# Altium PCB HW_Z-BAND_SMART_AMP_R1.PcbDoc (part 4 of 5)
Units mil, origin at the board's own origin, x right, y up, seen from the top; angles counter-clockwise.
Board outline 10200 x 3900 mil, 4 copper layers (Top Layer, Int1 (GND), Int2 (PWR), Bottom Layer), stack 60.134 mil thick; 398 components, 240 nets, 1098 pads, 2492 vias.
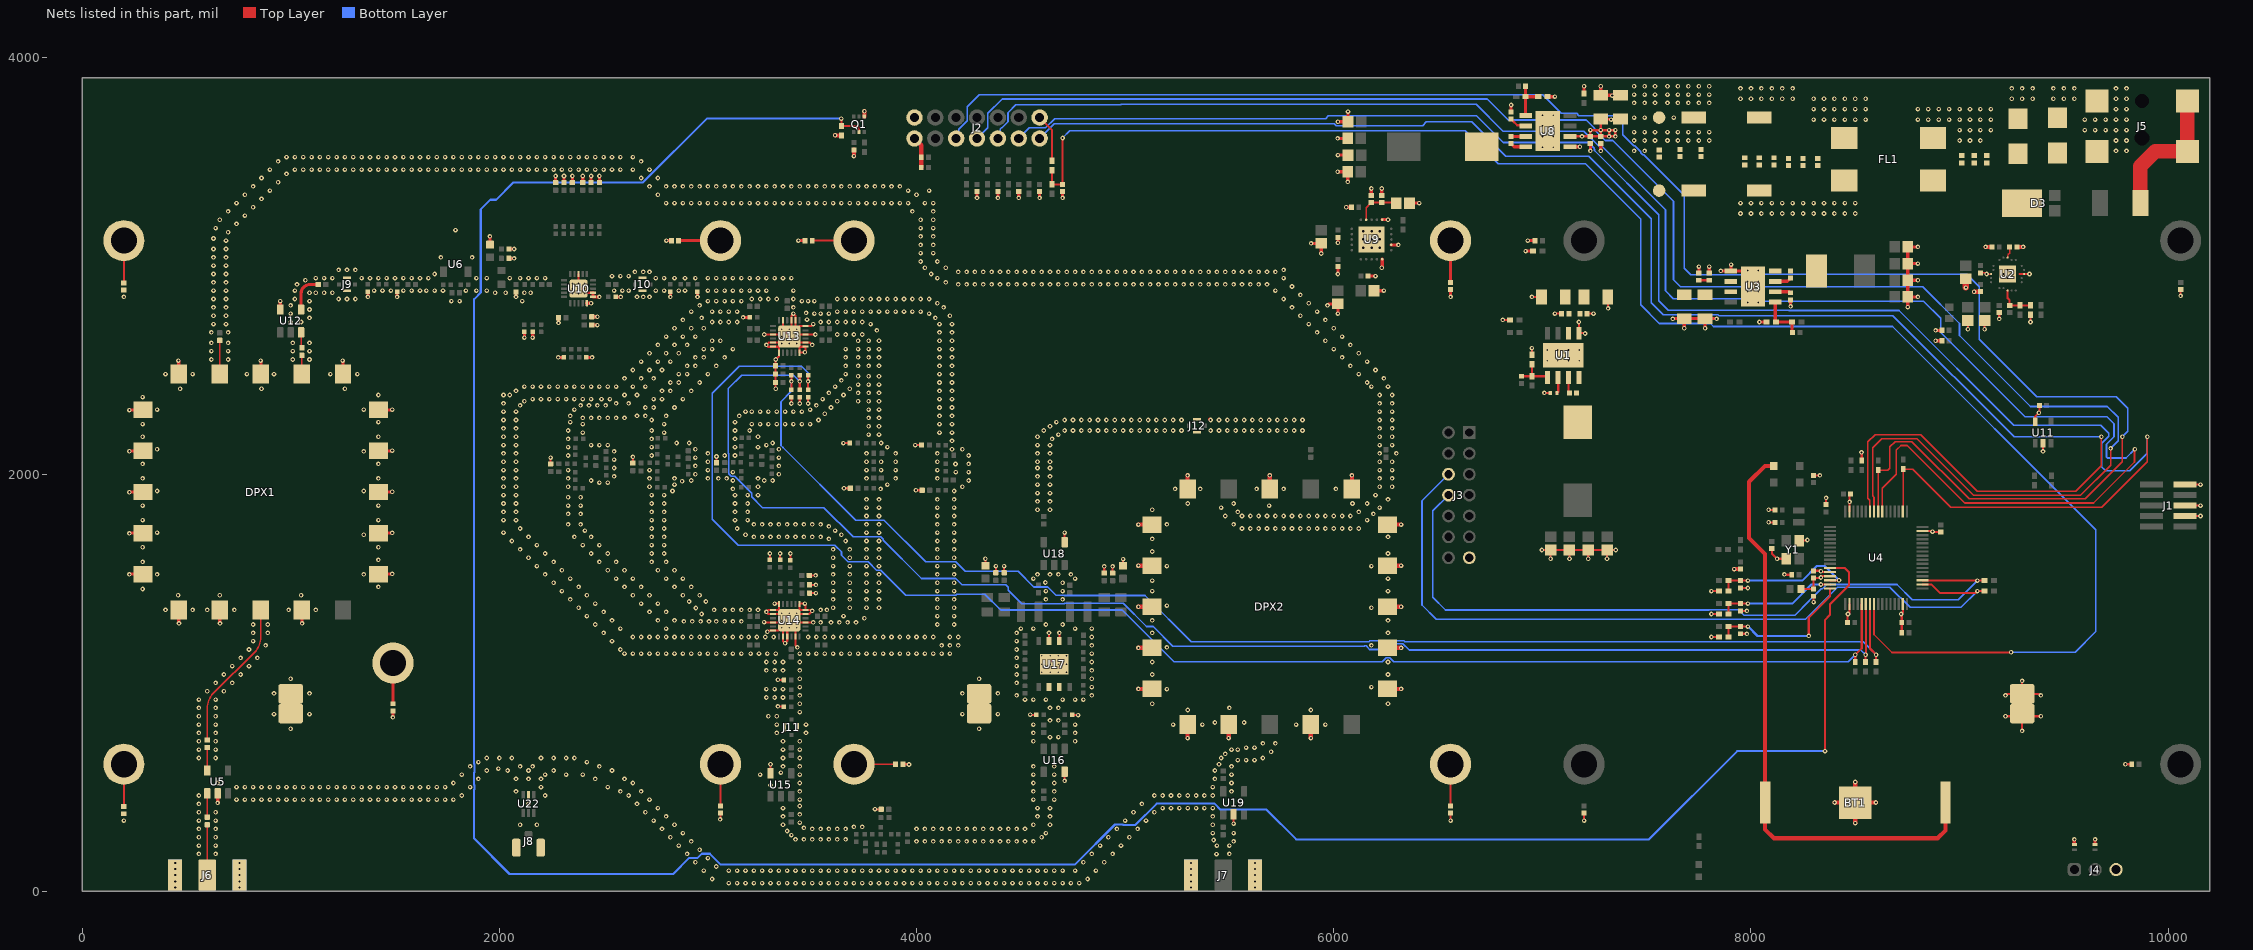
[diagram p5: the nets of this part, all layers, seen from the top]

## Via types
v1: diameter 22, hole 10, Top Layer to Bottom Layer, tented both sides, 2396 vias
v2: diameter 19.68, hole 7.87, Top Layer to Bottom Layer, tented both sides, 30 vias
v3: diameter 19.68, hole 7.87, Top Layer to Bottom Layer, 28 vias
v4: diameter 19.68, hole 9.84, Top Layer to Bottom Layer, tented both sides, 20 vias
v5: diameter 15.75, hole 7.87, Top Layer to Bottom Layer, tented both sides, 9 vias
v6: diameter 23.62, hole 11.81, Top Layer to Bottom Layer, 9 vias

## Nets (pads, with @x,y where several pads share a name; then routed paths per layer and width w, separated by ;. In a path a pad name is that pad's centre, name@x,y a point inside that pad or via, vN(x,y) a via of type N, cw(c..) or ccw(c..) an arc to the next point about the centre after c; other vN are vias at no path point) (continued)
GND: BT1.1 C1.2 C3.1 C4.1 C5.1 C6.1 C8.1 C9.1 C10.1 C11.1 C12.1 C13.1 C14.1 C15.1 C16.1 C17.2 C18.1 C19.1 C20.1 C21.1 C22.1 C24.1 C33.1 C34.1 C35.1 C36.1 C37.1 C38.1 C39.1 C40.1 C41.1 C42.1 C43.2 C45.1 C46.1 C47.1 C48.1 C50.1 C51.1 C52.1 C53.1 C54.1 C55.1 C56.1 C57.2 C58.2 C59.2 C60.1 C61.1 C62.2 C63.1 C64.1 C65.1 C66.1 C67.1 C69.1 C70.1 C71.2 C72.1 C73.1 C74.2 C76.1 C77.1 C78.1 C79.1 C81.1 C82.1 C83.1 C84.1 C85.1 C86.1 C87.1 C88.1 C89.1 C90.2 C91.1 C92.1 C93.1 C94.1 C95.1 C96.2 C97.1 C98.1 C99.1 C100.1 C101.1 C102.1 C103.1 C104.1 C105.1 C111.1 C115.1 C118.1 C119.1 C120.1 C121.1 C122.1 C123.1 C124.1 C125.1 C126.1 C127.1 C128.1 C129.1 C136.1 C137.2 C138.2 C153.2 C154.1 C155.2 C157.1 C159.1 C160.1 C161.1 C162.1 C163.1 C168.1 C170.1 C177.1 C179.1 C190.1 D1.1 D10.1 DPX1.1 DPX1.2 DPX1.3 DPX1.4 DPX1.5 DPX1.6 DPX1.8 DPX1.10 DPX1.11 DPX1.12 DPX1.13 DPX1.14 DPX1.15 DPX1.16 DPX1.17 DPX1.19 DPX2.1 DPX2.2 DPX2.3 DPX2.4 DPX2.5 DPX2.6 DPX2.8 DPX2.10 DPX2.11 DPX2.12 DPX2.13 DPX2.14 DPX2.15 DPX2.16 DPX2.17 DPX2.19 FB5.2 J1.3 J1.5 J1.9 J2.7 J2.8 J3.13 J4.3 J6.2 J7.2 J8.G1 J8.G2 J9.G1 J9.G2 J10.G1 J10.G2 J11.G1 J11.G2 J12.G1 J12.G2 L12.1 L15.1 Q1.1 R1.1 R3.1 R4.1 R17.1 R18.1 R19.1 R28.1 R31.2 R36.1 R39.1 R42.1 R44.1 R50.1 R51.1 R52.1 R54.1 R56.2 R61.1 R63.1 R64.1 R65.1 R66.1 R69.1 R70.1 R71.1 R72.1 R82.1 R83.1 R84.1 R85.1 R90.2 R91.1 T1.1 TP1.1 TP2.1 TP3.1 U1.1 U1.9 U2.8 U2.18 U2.21 U3.1 U3.9 U4.12 U4.18 U4.31 U4.47 U4.63 U5.2 U6.2 U8.1 U8.9 U9.5 U9.7 U9.11 U9.21 U10.10 U10.11 U10.12 U10.18 U10.21 U11.2 U11.5 U12.4 U13.3 U13.5 U13.6 U13.7 U13.12 U13.13 U13.14 U13.16 U13.18 U13.20 U13.21 U13.23 U13.25 U14.3 U14.5 U14.6 U14.7 U14.12 U14.13 U14.14 U14.16 U14.18 U14.20 U14.21 U14.23 U14.25 U15.4 U16.4 U17.2 U17.3 U17.6 U17.7 U17.9 U18.6 U19.2 U22.2 Y1.2 Y1.4 | length 13021.4
  Top Layer w6: C66.1@9100,2965.35 9124.65,2965.35 v1(9130,2960) U2.18@9151.26,2960
  Top Layer w10: C170.1@2246.06,2049.61 v1(2246.06,2079.8) ; v5(2379.94,2890) 2399.63,2870.31 U10.12@2449.89,2870.31 ; v5(2379.94,2915) U10.18@2379.94,2959.94 ; C177.1@2640.08,2053.46 v1(2640.08,2083.66) ; C157.1@3041.34,2055.12 v1(3041.34,2085.31) ; v1(3058.78,345.94) 3060,347.17 C37.1@3060,375.35 ; v1(3269.68,1291.33) 3269.68,1290.64 3270.16,1290.16 U14.16@3312.24,1290.16 3380.16,1290.16 v2(3390,1300) 3399.84,1290.16 U14.3@3467.76,1290.16 3504.84,1290.16 v1(3505,1290) ; v1(3270,2670) 3311.77,2670 U13.3@3312.24,2670.47 3344.72,2670.47 v2(3354.57,2660.63) ; v1(3285,1245) 3290.79,1250.79 U14.18@3312.24,1250.79 3340.35,1250.79 v2(3354.57,1265) 3360.47,1259.09 U14.20@3360.47,1222.24 3360.47,1199.53 v1(3370,1190) 3380.16,1200.16 U14.21@3380.16,1222.24 3380.16,1255.16 v2(3390,1265) ; R69.1@3297.24,1590.12 v1(3297.24,1620.31) ; U15.4@3299.84,566.18 3299.84,609.84 v1(3300,610) ; v1(3320,1380) 3338.54,1380 U14.12@3340.79,1377.76 U14.25@3340.79,1347.78 ; v1(3325,2410) 3323.78,2411.22 C126.1@3323.78,2440 C125.1@3323.78,2480.63 C124.1@3323.78,2520.63 3323.78,2548.78 v1(3325,2550) 3340.79,2565.79 U13.7@3340.79,2582.87 U13.25@3340.79,2612.85 ; v1(3335,887.05) 3336.22,885.83 R85.1@3364.41,885.83 ; v1(3335,1015) 3336.22,1013.78 R84.1@3364.41,1013.78 ; R70.1@3346.46,1590.12 v1(3346.46,1620.31) ; v2(3354.57,2695.63) 3360.47,2701.54 U13.23@3360.47,2738.39 ; v2(3390,2695.63) 3399.84,2705.47 U13.21@3399.84,2738.39 3399.84,2759.84 v1(3410,2770) 3419.53,2760.47 U13.20@3419.53,2738.39 3419.53,2701.54 v2(3425.43,2695.63) 3439.65,2709.84 U13.18@3467.76,2709.84 3494.84,2709.84 v1(3505,2720) ; v1(3395,1620) 3395.67,1619.33 R71.1@3395.67,1588.15 ; v1(3400,2339.37) R64.1@3400,2369.57 ; v2(3425.43,1265) 3419.53,1259.09 U14.23@3419.53,1222.24 3419.53,1179.6 3422.44,1176.68 3422.44,1172.56 3425,1170 v1(3428.44,1170) ; v2(3425.43,2660.63) 3435.28,2670.47 U13.16@3467.76,2670.47 3514.53,2670.47 v1(3515,2670) ; v1(3440,2339.37) R65.1@3440,2369.57 ; v1(3480,2339.37) R66.1@3480,2369.57 ; C127.1@3486.22,1515 v1(3516.42,1515) ; C129.1@3487.48,1430.16 v1(3517.68,1430.16) ; C128.1@3487.48,1470.16 v1(3517.68,1470.16) ; v1(3500,2620) 3488.9,2631.1 U13.14@3467.76,2631.1 3429.91,2631.1 v2(3425.43,2626.63) U13.25@3439.21,2612.85 ; v1(3649.33,2149.61) L12.1@3679.53,2149.61 ; v1(3652.48,1933.07) C179.1@3682.68,1933.07 ; v1(3800.91,394.92) 3802.13,393.7 C159.1@3830.32,393.7 ; C39.1@3934.65,610 3962.83,610 v1(3964.06,608.78) ; v1(3993.74,2139.92) L15.1@4023.94,2139.92 ; v1(3996.89,1923.39) C190.1@4027.09,1923.39 ; C155.2@4330,1561.02 v1(4330,1595) ; C154.1@4380,1528.11 v1(4380,1560) ; C153.2@4420,1528.11 v1(4420,1560) ; v1(4545.16,847.68) 4546.38,846.46 R90.2@4574.57,846.46 ; U17.7@4635,1200.24 v1(4635,1240) ; U17.6@4685,1200.24 v1(4685,1240) ; v1(4710,530) U16.4@4710,573.58 ; U18.6@4710,1674.92 v1(4710,1720) ; R91.1@4745.43,846.46 4773.62,846.46 v1(4774.84,845.24) ; C136.1@4900,1526.22 v1(4900,1558.11) ; C137.2@4940,1526.22 v1(4940,1558.11) ; C138.2@4990,1559.13 C138.2@4990,1561.02 v1(4990,1593.11) ; v1(5520,325) U19.2@5520,370 ; v1(6560,340) C41.1@6560,375.35 ; v1(6810,2740) R3.1@6844.72,2740 ; R4.1@6950,2572.64 v1(6950,2605) ; v1(6950,2850) C4.1@6995.83,2850 ; v1(6997.99,1637.01) C8.1@7040,1637.01 ; v1(7010,2390) C1.2@7038.5,2390 ; v1(7040,1595) C8.1@7040,1637.01 ; v1(7060,2770) C6.1@7092.68,2770 ; v1(7130,1595) C9.1@7130,1637.01 ; v1(7175,2730) U1.1@7175,2676.3 7203.7,2676.3 v1(7205,2675) ; v1(7200,340) C160.1@7200,375.35 ; C5.1@7214.65,2770 v1(7245,2770) ; v1(7220,1595) C10.1@7220,1637.01 ; v1(7310,1595) C11.1@7310,1637.01 ; C3.1@7314.17,2850 7314.17,2795.83 v1(7315,2795) ; v1(7335,3815) 7337.09,3817.09 C77.1@7375,3817.09 ; v1(7352.01,1637.01) C11.1@7310,1637.01 ; v1(7810,1220) R44.1@7847.36,1220 ; v1(7810,1330) R42.1@7847.36,1330 ; v1(7810,1440) R19.1@7847.36,1440 ; C100.1@7950,1235.35 7979.65,1235.35 v1(7980,1235) ; C16.1@7950,1345.35 7979.65,1345.35 v1(7980,1345) ; C15.1@7950,1455.35 7984.65,1455.35 v1(7985,1455) ; v1(8085,1770) 8086.46,1768.54 C58.2@8115.35,1768.54 ; v1(8085,1830) 8086.46,1828.54 C57.2@8115.35,1828.54 ; C59.2@8100,1643.9 8100,1620 v1(8125,1595) 8125.24,1595.24 Y1.4@8168.5,1595.24 ; v1(8160,1520) 8161.46,1518.54 C62.2@8195.35,1518.54 ; Y1.2@8231.5,1681.85 8266.85,1681.85 v1(8270,1685) ; v1(8300,1387) C54.1@8300,1415.35 ; C55.1@8300,1537.32 8332.68,1537.32 v1(8335,1535) 8338.9,1531.1 U4.12@8378.5,1531.1 ; C63.1@8300,1994.65 8329.65,1994.65 v1(8330,1995) ; C64.1@8360,1854.65 v1(8360,1887) ; C18.1@8462.68,1290 8462.68,1327.68 v1(8465,1330) 8472.05,1337.05 U4.18@8472.05,1378.5 ; U4.63@8472.05,1821.5 8472.05,1867.05 v1(8473,1868) 8473,1900.68 C17.2@8477.32,1905 ; v1(8530,2105) 8531.08,2103.92 R31.2@8531.08,2065.48 ; C19.1@8722.68,1240 C102.1@8722.68,1290 8722.68,1327.32 v1(8720,1330) 8727.95,1337.95 U4.31@8727.95,1378.5 ; U4.47@8821.5,1727.95 8867.05,1727.95 v1(8870,1725) 8872.32,1722.68 C20.1@8910,1722.68 ; v1(9040,2695) C70.1@9040,2737.01 ; v1(9120,2695) C69.1@9120,2737.01 ; v1(9190,2745) C71.2@9190,2775.35 ; v1(9220,840) 9269.2,840 ccw(c9269.2,883.55) TP3.1@9300,852.76 ; v1(9220,940) cw(c9237.49,922.51) 9237.49,947.24 TP3.1@9300,947.24 ; 9287.46,2960 U2.8@9309.13,2960 v1(9335,2960) ; v1(9300,770) TP3.1@9300,852.76 ; v1(9300,1010) TP3.1@9300,947.24 ; v1(9340,2730) R36.1@9340,2764.72 ; U11.5@9362.6,2251.18 9362.6,2277.6 v1(9380,2295) 9382.68,2297.68 C14.1@9382.68,2330 ; v1(9390,840) 9330.8,840 cw(c9330.8,883.55) TP3.1@9300,852.76 ; v1(9390,940) ccw(c9372.51,922.51) 9372.51,947.24 TP3.1@9300,947.24 ; v1(9400,2110) U11.2@9400,2148.82 ; v1(9795,610) C161.1@9825.35,610 ; v1(10060,2855) C162.1@10060,2885.35 ; J1.3@10080.12,1800 v1(10155,1800) ; J1.5@10080.12,1850 v1(10155,1850) ; J1.9@10080.12,1950 v1(10155,1950) ; U14.25@3340.79,1347.78 v2(3354.57,1334) 3350.09,1329.53 U14.14@3312.24,1329.53 3290.47,1329.53 v1(3280,1340) 3289.21,1349.21 U14.13@3312.24,1349.21 3339.35,1349.21 U14.25@3340.79,1347.78 ; U13.25@3340.79,2612.85 v2(3354.57,2626.63) 3350.09,2631.1 U13.5@3312.24,2631.1 3291.1,2631.1 v1(3280,2620) 3288.58,2611.42 U13.6@3312.24,2611.42 3339.35,2611.42 U13.25@3340.79,2612.85 ; U14.25@3439.21,1347.78 U14.7@3439.21,1377.76 3441.46,1380 v1(3465,1380) 3467.76,1377.24 U14.6@3467.76,1349.21 ; U14.25@3439.21,1347.78 3440.65,1349.21 U14.6@3467.76,1349.21 ; U14.25@3439.21,1347.78 v2(3425.43,1334) 3429.91,1329.53 U14.5@3467.76,1329.53 3484.53,1329.53 v1(3500,1345) 3495.79,1349.21 U14.6@3467.76,1349.21 ; U13.25@3439.21,2612.85 3440.65,2611.42 U13.13@3467.76,2611.42 3467.76,2587.76 v1(3465,2585) 3460,2585 3457.87,2582.87 U13.12@3439.21,2582.87 U13.25@3439.21,2612.85 ; C8.1@7040,1637.01 C9.1@7130,1637.01 ; C9.1@7130,1637.01 C10.1@7220,1637.01 ; C10.1@7220,1637.01 C11.1@7310,1637.01
  Top Layer w15: v1(226.89,1519.96) 228.19,1521.26 DPX1.15@291.89,1521.26 ; v1(226.89,1716.81) 228.19,1718.11 DPX1.14@291.89,1718.11 ; v1(226.89,1913.66) 228.19,1914.96 DPX1.13@291.89,1914.96 ; v1(226.89,2110.51) 228.19,2111.81 DPX1.12@291.89,2111.81 ; v1(226.89,2307.36) 228.19,2308.66 DPX1.11@291.89,2308.66 ; v1(461.85,2544.92) 463.15,2543.62 DPX1.10@463.15,2479.92 ; DPX1.16@463.15,1350 463.15,1286.3 v1(464.45,1285) ; v1(650,425) U5.2@650,470 ; DPX1.17@660,1350 660,1286.3 v1(661.3,1285) ; v1(855.55,2544.92) 856.85,2543.62 DPX1.8@856.85,2479.92 ; U12.4@950,2789.84 v1(950,2830) ; DPX1.19@1053.7,1350 1053.7,1286.3 v1(1055,1285) ; v1(1249.25,2544.92) 1250.55,2543.62 DPX1.6@1250.55,2479.92 ; v1(1370,2850) R50.1@1370,2874.57 ; DPX1.1@1421.81,1521.26 1485.51,1521.26 v1(1486.81,1522.56) ; DPX1.2@1421.81,1718.11 1485.51,1718.11 v1(1486.81,1719.41) ; DPX1.3@1421.81,1914.96 1485.51,1914.96 v1(1486.81,1916.26) ; DPX1.4@1421.81,2111.81 1485.51,2111.81 v1(1486.81,2113.11) ; DPX1.5@1421.81,2308.66 1485.51,2308.66 v1(1486.81,2309.96) ; v1(1490,835) C36.1@1490,865.35 ; v1(1510,2850) R51.1@1510,2874.57 ; C60.1@1955,3101.02 v1(1955,3140) ; C111.1@2046.22,3035 v1(2070.79,3035) ; C61.1@2046.22,3080 v1(2070.79,3080) ; v1(2080,2850) C168.1@2080,2873.78 ; v1(2120,2655) R56.2@2120,2682.28 ; v1(2160,2655) R54.1@2160,2682.28 ; C118.1@2270,3398.11 v1(2270,3430) ; v1(2282.72,2560) R61.1@2310,2560 ; v1(2283.78,2725.43) C101.1@2283.78,2750 ; C123.1@2310,3398.11 v1(2310,3430) ; C122.1@2350,3398.11 v1(2350,3430) ; C121.1@2400,3398.11 v1(2400,3430) ; R63.1@2417.72,2560 v1(2445,2560) ; U10.10@2419.31,2820.06 2419.37,2820 v1(2440,2820) ; C120.1@2440,3398.11 v1(2440,3430) ; C105.1@2443.11,2715 v1(2470.39,2715) ; C99.1@2443.11,2755 v1(2470,2755) ; U10.12@2449.89,2870.31 U10.11@2449.89,2850.63 2479.37,2850.63 v1(2480,2850) ; C119.1@2480,3398.11 v1(2480,3430) ; R52.1@2557.72,2850 v1(2582.28,2850) ; v1(2800.79,3120) C38.1@2825.35,3120 ; v1(2820,2850) R82.1@2820,2874.57 ; v1(2950,2850) R83.1@2950,2874.57 ; v1(3168.9,2751.97) R72.1@3200.79,2751.97 ; v1(3433.46,3120) C40.1@3465.35,3120 ; v1(4290,3325) C95.1@4290,3355.35 ; v1(4390,3325) C94.1@4390,3355.35 ; v1(4490,3325) C24.1@4490,3355.35 ; v1(4590,3325) C22.1@4590,3355.35 ; v1(4700,3325) C21.1@4700,3355.35 ; v1@5404.33,2263.78 5408.11,2260 v1(5410,2260) ; v1(5891.5,3107.01) C85.1@5940,3107.01 v1(5940,3058.5) ; v1(5970,2810) 5977.01,2817.01 C89.1@6020,2817.01 v1(6020,2770) ; v1(6018.5,3450) C84.1@6067.01,3450 v1(6067.01,3401.5) ; v1(6018.5,3610) C82.1@6067.01,3610 ; v1(6020,2960) C90.2@6020,2995.35 ; v1(6020,3110) C86.1@6020,3135.35 ; v1(6020,3530) C83.1@6068.5,3530 ; v1(6020,3690) C81.1@6068.5,3690 v1(6068.5,3738.5) ; v1(6060,3280) C87.1@6085.35,3280 ; C91.1@6164.65,2950 v1(6200,2950) ; C92.1@6180,3337.32 v1(6180,3370) ; C88.1@6192.99,2880 v1(6240,2880) ; v1(6230,2990) 6232.36,2992.36 U9.5@6232.36,3031.02 ; C93.1@6230,3337.32 v1(6230,3370) ; U9.11@6232.36,3220.71 6259.29,3220.71 v1(6260,3220) ; U9.7@6275.67,3099.92 v1(6310,3100) v1(6310,3100) ; C115.1@6362.99,3300 v1(6410,3300) ; v1(6560,2850) C42.1@6560,2885.35 ; C74.2@6850,3737.32 v1(6850,3770) ; v1(6920,3070) R1.1@6954.72,3070 ; v1(6930,3120) C163.1@6965.35,3120 ; R28.1@7025.28,3810 v1(7060,3810) ; U8.1@7132.6,3570 v1(7180,3570) ; R39.1@7200,3825.28 v1(7200,3860) ; v1(7230,3550) C79.1@7230,3585.35 ; v1(7280,3550) C78.1@7280,3585.35 ; v1(7280,3860) C76.1@7280,3817.09 7332.91,3817.09 v1(7335,3815) ; v1(7625,2745) 7625.83,2745.83 C46.1@7680,2745.83 ; v1(7680,2700) C46.1@7680,2745.83 ; C47.1@7750,2964.65 v1(7750,2995) ; v1(7780,2700) C45.1@7780,2745.83 ; C48.1@7800,2964.65 v1(7800,2995) ; v1(7835,2745) 7834.17,2745.83 C45.1@7780,2745.83 ; v1(7855,2975) U3.1@7903.7,2975 ; v1(7905,3005) 7903.7,3003.7 U3.1@7903.7,2975 ; v3(7984.41,2976.77) 7982.64,2975 U3.1@7903.7,2975 ; v1(8040,2730) R17.1@8074.72,2730 ; v1(8190,2805) C43.2@8190,2835.35 ; v1(8751.5,2801.5) C53.1@8751.5,2850 ; v1(8800,2850) C53.1@8751.5,2850 ; v1(8800,2930) C52.1@8751.5,2930 ; v1(8800,3010) C51.1@8751.5,3010 ; v1(8800,3090) C50.1@8751.5,3090 C51.1@8751.5,3010 ; v1(8885,2640) C103.1@8915.35,2640 ; v1(8885,2690) C104.1@8915.35,2690 ; D1.1@9550,225.59 v1(9550,250) ; D10.1@9650,225.59 v1(9650,250) ; C46.1@7680,2745.83 C45.1@7780,2745.83 ; C53.1@8751.5,2850 C52.1@8751.5,2930 ; C52.1@8751.5,2930 C51.1@8751.5,3010
  Top Layer w20: v1(3610,3625) 3610.28,3624.72 R18.1@3640,3624.72 ; v1(3700,3525) C98.1@3700,3555.35 ; Q1.1@3750,3714.8 v1(3750,3740) ; J2.7@3990,3610 4022.68,3577.32 C96.2@4022.68,3520 C97.1@4022.68,3470 ; v1(5063.11,971.34) DPX2.15@5128.19,971.34 ; v1(5063.11,1168.19) DPX2.14@5128.19,1168.19 ; v1(5063.11,1365.04) DPX2.13@5128.19,1365.04 ; v1(5063.11,1561.89) DPX2.12@5128.19,1561.89 ; v1(5063.11,1758.74) DPX2.11@5128.19,1758.74 ; v1(5299.45,735) DPX2.16@5299.45,800.08 ; DPX2.10@5299.45,1930 v1(5299.45,1995.08) ; v1(5496.3,735) DPX2.17@5496.3,800.08 ; DPX2.8@5693.15,1930 v1(5693.15,1995.08) ; v1(5890,735) DPX2.19@5890,800.08 ; DPX2.6@6086.85,1930 v1(6086.85,1995.08) ; DPX2.1@6258.11,971.34 v1(6323.19,971.34) ; DPX2.2@6258.11,1168.19 v1(6323.19,1168.19) ; DPX2.3@6258.11,1365.04 v1(6323.19,1365.04) ; DPX2.4@6258.11,1561.89 v1(6323.19,1561.89) ; DPX2.5@6258.11,1758.74 v1(6323.19,1758.74) ; v1(7920,1545) 7920.35,1545.35 C56.1@7950,1545.35 ; v1(8401.38,426.38) BT1.1@8500,426.38 ; v1(8500,327.76) BT1.1@8500,426.38 ; v1(8500,525) BT1.1@8500,426.38 ; v1(8598.62,426.38) BT1.1@8500,426.38 ; v1(9070,2875) 9099.65,2875 C72.1@9100,2875.35 ; v1(9125,3090) C67.1@9155.35,3090 ; C73.1@9274.65,3090 v1(9305,3090)
  Top Layer w30: v1(9030,2895) C65.1@9030,2937.01
  other v1: 3100,40 3140,40 3180,40 3220,40 3260,40 3300,40 3340,40 3380,40 3420,40 3460,40 3500,40 3540,40 3580,40 3620,40 3660,40 3700,40 3740,40 3780,40 3820,40 3860,40 3900,40 3940,40 3980,40 4020,40 4060,40 4100,40 4140,40 4180,40 4220,40 4260,40 4300,40 4340,40 4380,40 4420,40 4460,40 4500,40 4540,40 4580,40 4620,40 4660,40 4700,40 4740,40 4780,40 3020,60 4820,60 2980,100 3100,100 3140,100 3180,100 3220,100 3260,100 3300,100 3340,100 3380,100 3420,100 3460,100 3500,100 3540,100 3580,100 3620,100 3660,100 3700,100 3740,100 3780,100 3820,100 3860,100 3900,100 3940,100 3980,100 4020,100 4060,100 4100,100 4140,100 4180,100 4220,100 4260,100 4300,100 4340,100 4380,100 4420,100 4460,100 4500,100 4540,100 4580,100 4620,100 4660,100 4700,100 4760,100 4860,100 3040,120 2940,140 4800,140 4900,140 3000,160 5438.15,179.44 560,180 640,180 2900,180 4840,180 4940,180 5500,180 2960,200 560,220 640,220 2860,220 4880,220 4980,220 5440,220 5500,220 2920,240 4000,240 4040,240 4080,240 4120,240 4160,240 4200,240 4240,240 4280,240 4320,240 4360,240 4400,240 4440,240 4480,240 4520,240 4560,240 5520,240 5423.92,246.62 3420,250 3460,250 3500,250 3540,250 3580,250 3620,250 3660,250 560,260 640,260 2820,260 4600,260 4920,260 5020,260 3400,270 2880,280 4620,280 5420,280 5520,280 3380,290 560,300 640,300 2780,300 3500,300 3540,300 3580,300 3620,300 3660,300 4000,300 4040,300 4080,300 4120,300 4160,300 4200,300 4240,300 4280,300 4320,300 4360,300 4400,300 4440,300 4480,300 4520,300 4960,300 5060,300 3460,305 3700,310 3740,310 2100,320 2180,320 2840,320 3360,320 4560,320 4640,320 5420,320 3440,330 200,340 560,340 640,340 2740,340 5000,340 5100,340 2800,360 3360,360 4580,360 4640,360 5420,360 3440,370 560,380 640,380 2700,380 5040,380 5140,380 2760,400 3360,400 4580,400 4640,400 5180,400 5220,400 5260,400 5300,400 5340,400 5380,400 5420,400 3440,410 560,420 2140,420 2660,420 5080,420 740,440 780,440 820,440 860,440 900,440 940,440 980,440 1020,440 1060,440 1100,440 1140,440 1180,440 1220,440 1260,440 1300,440 1340,440 1380,440 1420,440 1460,440 1500,440 1540,440 1580,440 1620,440 1660,440 1700,440 1740,440 1780,440 2720,440 3440,440 4560,440 4660,440 560,460 1820,460 2220,460 2620,460 5140,460 5180,460 5220,460 5260,460 5300,460 5340,460 5380,460 5420,460 2080,480 2580,480 2680,480 3440,480 4560,480 4660,480 5510,480 740,500 780,500 820,500 860,500 900,500 940,500 980,500 1020,500 1060,500 1100,500 1140,500 1180,500 1220,500 1260,500 1300,500 1340,500 1380,500 1420,500 1460,500 1500,500 1540,500 1580,500 1620,500 1660,500 1700,500 1740,500 1860,500 2200,500 2520,500 5420,500 3300,510 650,520 1780,520 2640,520 3440,520 4560,520 4660,520 5510,520 1900,540 2080,540 2140,540 2200,540 2460,540 2600,540 5430,540 1820,560 2220,560 2320,560 2400,560 3250,560 3440,560 4560,560 4660,560 5510,560 3350,570 1940,580 2040,580 2140,580 2260,580 2540,580 5430,580 1995.71,589.2 1860,600 2100,600 2160,600 2480,600 3360,600 3440,600 4560,600 4660,600 5510,600 5450,610 1900,620 2420,620 5540,630 5580,630 5620,630 560,640 640,640 1940,640 2000,640 2060,640 2200,640 2260,640 2320,640 2360,640 3360,640 3440,640 5460,640 5660,640 5480,660 5700,670 560,680 640,680 3360,680 3440,680 5510,680 5540,680 5580,690 5620,690 5660,710 5720,710 560,720 640,720 3360,720 3440,720 4560,720 4760,720 4640,740 4680,740 560,760 640,760 3330,760 3470,760 4560,760 4760,760 1000,780 4300,780 560,800 640,800 3330,800 3470,800 4560,800 4760,800 5230,800 5370,800 5820,800 5960,800 5430,810 5570,810 4640,820 4680,820 560,840 640,840 3290,840 3330,840 920,850 1090,850 4220,850 4390,850 3440,860 5300,870 5890,870 560,880 640,880 4640,880 4680,880 5500,880 3440,900 5130,900 6260,900 560,920 640,920 4520,920 4560,920 4620,920 4700,920 4760,920 4800,920 3280,930 3320,930 3360,930 3440,940 4480,940 4840,940 920,950 1090,950 4220,950 4390,950 600,960 680,960 3280,970 3320,970 3360,970 5200,970 3440,980 4840,980 6180,980 640,1000 720,1000 4480,1000 1000,1020 3440,1020 4300,1020 4840,1020 680,1040 760,1040 4480,1040 5130,1040 6260,1040 3280,1060 3320,1060 3360,1060 3440,1060 4840,1060 720,1080 800,1080 4480,1080 3280,1100 3320,1100 3360,1100 3440,1100 4840,1100 5130,1100 6260,1100 760,1120 840,1120 4480,1120 2600,1140 2640,1140 2680,1140 2720,1140 2760,1140 2800,1140 2840,1140 2880,1140 2920,1140 2960,1140 3000,1140 3040,1140 3080,1140 3120,1140 3160,1140 3205,1140 3245,1140 3285,1140 3325,1140 3440,1140 3480,1140 3520,1140 3560,1140 3600,1140 3640,1140 3680,1140 3720,1140 3760,1140 3800,1140 3840,1140 3880,1140 3920,1140 3960,1140 4000,1140 4040,1140 4080,1140 4120,1140 4160,1140 4840,1140 800,1160 2580,1160 4480,1160 5200,1170 880,1180 4120,1180 4160,1180 4200,1180 4840,1180 6180,1180 820,1200 2540,1200 4480,1200 2640,1220 2680,1220 2720,1220 2760,1220 2800,1220 2840,1220 2880,1220 2920,1220 2960,1220 3000,1220 3040,1220 3080,1220 3120,1220 3160,1220 3195,1220 3235,1220 3275,1220 3315,1220 3480,1220 3520,1220 3560,1220 3600,1220 3640,1220 3680,1220 3720,1220 3760,1220 3800,1220 3840,1220 3880,1220 3920,1220 3960,1220 4000,1220 4040,1220 4080,1220 4160,1220 4200,1220 4840,1220 820,1240 890,1240 2500,1240 4480,1240 5130,1240 6260,1240 2580,1260 2800,1260 4500,1260 4560,1260 4760,1260 4840,1260 820,1280 890,1280 2460,1280 4100,1280 4180,1280 4620,1280 4700,1280 3540,1290 3590,1290 3630,1290 3670,1290 3710,1290 2885,1295 2925,1295 2965,1295 3005,1295 3040,1295 3080,1295 3120,1295 3160,1295 2540,1300 2760,1300 2840,1300 5130,1300 6260,1300 3750,1310 2420,1320 3650,1320 4100,1320 4180,1320 2970,1330 2500,1340 2720,1340 2800,1340 400,1350 530,1350 600,1350 730,1350 990,1350 1120,1350 3030,1350 3080,1350 3120,1350 3160,1350 3200,1350 3240,1350 3540,1350 3570,1350 2942.09,1358.82 2380,1360 3600,1360 3680,1360 3760,1360 3820,1360 4100,1360 4180,1360 6180,1360 5200,1370 2460,1380 2680,1380 2760,1380 2910,1390 2990,1390 2340,1400 3600,1400 3680,1400 3760,1400 3820,1400 4100,1400 4180,1400 4620,1400 4700,1400 460,1420 660,1420 1050,1420 2420,1420 2640,1420 2720,1420 2880,1420 2960,1420 2300,1440 3600,1440 3680,1440 3760,1440 3820,1440 4100,1440 4180,1440 4620,1440 4700,1440 5130,1440 6260,1440 290,1450 1420,1460 2380,1460 2600,1460 2680,1460 2840,1460 2920,1460 2260,1480 3600,1480 3680,1480 3760,1480 3820,1480 4100,1480 4180,1480 4700,1480 4617.39,1481.03 5130,1490 2340,1500 2560,1500 2640,1500 2800,1500 2880,1500 4560,1500 4760,1500 6260,1500 360,1520 1350,1520 2220,1520 3600,1520 3680,1520 3760,1520 3820,1520 4100,1520 4180,1520 4580,1520 4640,1520 4680,1520 4740,1520 2300,1540 2520,1540 2600,1540 2760,1540 2840,1540 2180,1560 3600,1560 3680,1560 3760,1560 3820,1560 4100,1560 4180,1560 5200,1560 6180,1560 290,1580 2260,1580 2480,1580 2560,1580 2730,1580 2800,1580 1420,1590 2140,1600 3600,1600 3680,1600 3760,1600 3820,1600 4100,1600 4180,1600 2220,1620 2440,1620 2520,1620 2730,1620 2790,1620 6260,1620 5130,1630 2100,1640 3600,1640 3680,1640 3760,1640 3820,1640 4100,1640 4180,1640 290,1650 1420,1650 2180,1660 2400,1660 2480,1660 2730,1660 2790,1660 2060,1680 3660,1680 3760,1680 3820,1680 4100,1680 4180,1680 3580,1690 5130,1690 2140,1700 2360,1700 2440,1700 2730,1700 2790,1700 3220,1700 3260,1700 3300,1700 3340,1700 3380,1700 3420,1700 3460,1700 3500,1700 3540,1700 6260,1700 1350,1710 3180,1710 3640,1710 360,1720 2020,1720 3760,1720 3820,1720 4100,1720 4180,1720 2410,1730 3610,1730 2100,1740 2730,1740 2790,1740 3140,1740 5560,1740 5600,1740 5640,1740 5680,1740 5720,1740 5760,1740 5800,1740 5840,1740 5880,1740 5920,1740 5960,1740 6000,1740 6040,1740 6080,1740 6120,1740 3580,1750 2330,1760 2390,1760 3220,1760 3260,1760 3300,1760 3340,1760 3380,1760 3420,1760 3460,1760 3500,1760 3540,1760 3760,1760 3820,1760 4100,1760 4180,1760 5200,1760 5520,1760 290,1780 1420,1780 2020,1780 2080,1780 2730,1780 2790,1780 3130,1780 3190,1780 6160,1780 3760,1800 3820,1800 4100,1800 4180,1800 5480,1800 5560,1800 5600,1800 5640,1800 5680,1800 5720,1800 5760,1800 5800,1800 5840,1800 5880,1800 5920,1800 5960,1800 6000,1800 6040,1800 6080,1800 2330,1810 2390,1810 6190,1810 2020,1820 2080,1820 2730,1820 2790,1820 3130,1820 3190,1820 5540,1820 6120,1820 4580,1830 4640,1830 5130,1830 3760,1840 3820,1840 4100,1840 4180,1840 5460,1840 6220,1840 290,1850 1420,1850 2330,1850 2390,1850 5690,1850 2020,1860 2080,1860 2730,1860 2790,1860 3130,1860 3190,1860 5300,1860 5520,1860 6090,1860 6160,1860 4580,1870 4640,1870 3760,1880 3820,1880 4100,1880 4180,1880 6260,1880 2330,1890 2390,1890 2020,1900 2080,1900 2730,1900 2790,1900 3130,1900 3190,1900 3240,1900 6200,1900 4580,1910 4640,1910 360,1920 1350,1920 2830,1920 4180,1920 3120,1930 3828.21,1929.92 5240,1930 5360,1930 5630,1930 5760,1930 6010,1930 2020,1940 2080,1940 2330,1940 2720,1940 3240,1940 4220,1940 6220,1940 6280,1940 2840,1950 3860,1950 4580,1950 4640,1950 2480,1960 2520,1960 2876.09,1966.53 2440,1970 2920,1970 3120,1970 3270,1970 3310,1970 4250,1970 290,1980 1420,1980 2020,1980 2080,1980 2330,1980 2720,1980 2840,1980 3000,1980 3050,1980 3090,1980 3240,1980 3760,1980 3900,1980 4100,1980 6220,1980 6280,1980 2550,1990 4580,1990 4640,1990 2940,2000 3340,2000 3120,2010 4187.82,2010.24 4250,2010 2020,2020 2080,2020 2330,2020 2720,2020 3000,2020 3760,2020 3830,2020 3900,2020 4100,2020 6220,2020 6280,2020 2550,2030 4580,2030 4640,2030 2940,2040 3340,2040 4187.02,2049.22 290,2050 1420,2050 4250,2050 2020,2060 2080,2060 3000,2060 3760,2060 3830,2060 3900,2060 4100,2060 4580,2060 4640,2060 6220,2060 6280,2060 2550,2070 2940,2080 3340,2080 2330,2090 2730,2090 3080,2090 3130,2090 4250,2090 2020,2100 2080,2100 3000,2100 3760,2100 3900,2100 4100,2100 4580,2100 4640,2100 6220,2100 6300,2100 1350,2110 2550,2110 360,2120 2940,2120 3340,2120 4170,2120 4220,2120 2330,2130 2730,2130 3130,2130 3240,2130 3860,2130 2020,2140 2080,2140 2440,2140 2480,2140 2520,2140 3280,2140 4580,2140 4640,2140 6220,2140 6280,2140 2850,2150 2910,2150 3310,2150 3830,2150 4170,2160 2330,2170 2730,2170 3130,2170 4650,2170 290,2180 1420,2180 2020,2180 2080,2180 3240,2180 4580,2180 6220,2180 6280,2180 3770,2190 3820,2190 4680,2190 2400,2200 2790,2200 4110,2200 4170,2200 2330,2210 2730,2210 3130,2210 3200,2210 4610,2210 4710,2210 4750,2210 4790,2210 4830,2210 4870,2210 4910,2210 4950,2210 4990,2210 5030,2210 5070,2210 5110,2210 5150,2210 5190,2210 5230,2210 5270,2210 5410,2210 5450,2210 5490,2210 5530,2210 5570,2210 5610,2210 5650,2210 5690,2210 5730,2210 5770,2210 5810,2210 5850,2210 2020,2220 2080,2220 6220,2220 6280,2220 3770,2230 3820,2230 4640,2230 290,2240 2400,2240 2790,2240 3210,2240 3250,2240 3290,2240 3330,2240 3370,2240 3410,2240 3450,2240 3490,2240 4110,2240 4170,2240 1420,2250 2340,2250 3130,2250 4670,2250 2020,2260 2080,2260 2730,2260 3530,2260 4710,2260 4750,2260 4790,2260 4830,2260 4870,2260 4910,2260 4950,2260 4990,2260 5030,2260 5070,2260 5110,2260 5150,2260 5190,2260 5230,2260 5270,2260 5450,2260 5490,2260 5530,2260 5570,2260 5610,2260 5650,2260 5690,2260 5730,2260 5770,2260 5810,2260 5850,2260 6220,2260 6280,2260 2400,2270 2440,2270 2480,2270 2520,2270 2560,2270 2600,2270 3770,2270 3820,2270 2340,2280 2660,2280 2700,2280 2800,2280 3150,2280 4110,2280 4170,2280 3560,2290 2020,2300 2080,2300 3180,2300 3210,2300 3250,2300 3290,2300 3330,2300 3370,2300 3410,2300 3450,2300 6220,2300 6280,2300 360,2310 1350,2310 2360,2310 3490,2310 3770,2310 3820,2310 2700,2320 2740,2320 2840,2320 3590,2320 4110,2320 4170,2320 2100,2330 2390,2330 2430,2330 2470,2330 2510,2330 3520,2330 2020,2340 2560,2340 2620,2340 6220,2340 6280,2340 2120,2350 3620,2350 3720,2350 3770,2350 3820,2350 2160,2360 2200,2360 2240,2360 2280,2360 2320,2360 2360,2360 2400,2360 2440,2360 2490,2360 2530,2360 2740,2360 2780,2360 2880,2360 3550,2360 4110,2360 4170,2360 290,2370 1420,2380 2020,2380 2050,2380 2600,2380 2660,2380 3650,2380 6220,2380 6280,2380 3580,2390 3720,2390 3770,2390 3820,2390 2080,2400 2780,2400 2820,2400 2920,2400 4110,2400 4170,2400 470,2410 860,2410 1260,2410 3680,2410 2120,2420 2160,2420 2200,2420 2240,2420 2280,2420 2320,2420 2360,2420 2400,2420 2440,2420 2480,2420 2520,2420 2560,2420 2640,2420 2700,2420 3610,2420 6180,2420 6260,2420 3720,2430 3770,2430 3820,2430 2820,2440 2860,2440 2960,2440 4110,2440 4170,2440 6160,2440 3640,2450 2600,2460 2680,2460 2740,2460 6240,2460 3720,2470 3770,2470 3820,2470 400,2480 530,2480 790,2480 920,2480 1190,2480 1320,2480 2860,2480 2900,2480 3000,2480 3660,2480 4110,2480 4170,2480 6120,2480 2640,2500 2720,2500 2780,2500 6200,2500 2900,2520 2940,2520 3040,2520 3660,2520 3720,2520 3770,2520 3820,2520 4110,2520 4170,2520 6080,2520 2680,2540 2760,2540 2820,2540 6160,2540 620,2550 700,2550 1010,2550 1090,2550 2940,2560 2980,2560 3080,2560 3660,2560 3720,2560 3770,2560 3820,2560 4110,2560 4170,2560 6040,2560 2720,2580 2800,2580 2860,2580 6120,2580 620,2590 700,2590 1010,2590 1090,2590 2980,2600 3020,2600 3120,2600 3660,2600 3720,2600 3770,2600 3820,2600 4110,2600 4170,2600 6000,2600 2760,2620 2840,2620 2900,2620 6080,2620 620,2630 700,2630 1010,2630 1090,2630 3020,2640 3060,2640 3720,2640 3770,2640 3820,2640 4110,2640 4170,2640 5960,2640 2800,2660 2880,2660 2940,2660 6040,2660 3620,2670 3660,2670 3700,2670 3740,2670 620,2680 700,2680 4110,2680 4170,2680 5920,2680 3810,2690 2840,2700 2920,2700 2980,2700 6000,2700 630,2720 690,2720 3780,2720 4110,2720 4170,2720 5880,2720 1000,2730 1050,2730 3020,2730 3060,2730 3100,2730 3140,2730 3540,2730 3580,2730 3620,2730 3660,2730 3700,2730 3740,2730 2880,2740 5960,2740 3474.88,2741.37 1090,2750 2970,2750 4090,2750 630,2760 690,2760 4160,2760 5840,2760 1000,2770 3510,2770 3540,2770 3580,2770 4060,2770 3470.47,2773.86 2920,2780 3020,2780 3060,2780 3100,2780 3140,2780 3620,2780 3660,2780 3700,2780 3740,2780 3780,2780 3820,2780 3860,2780 3900,2780 3940,2780 3980,2780 4020,2780 5920,2780 1090,2790 630,2800 690,2800 3410,2800 4130,2800 5800,2800 1000,2810 2960,2810 4100,2820 5880,2820 1090,2830 1770,2830 1810,2830 2110,2830 3000,2830 3040,2830 3080,2830 3120,2830 3160,2830 3450,2830 3480,2830 3510,2830 630,2840 690,2840 1020,2840 1230,2840 1270,2840 1310,2840 3210,2840 3250,2840 3290,2840 3330,2840 3410,2840 3620,2840 3660,2840 3700,2840 3740,2840 3780,2840 3820,2840 3860,2840 3900,2840 3940,2840 3980,2840 4020,2840 4060,2840 5760,2840 200,2850 2660,2850 2690,2850 2720,2850 5840,2860 1090,2870 1120,2870 1160,2870 1200,2870 1980,2870 2030,2870 2120,2870 2150,2870 630,2880 690,2880 1020,2880 1400,2880 1440,2880 1480,2880 1540,2880 1580,2880 1620,2880 1650,2880 1690,2880 1730,2880 1840,2880 1890,2880 1940,2880 2550,2880 2590,2880 2620,2880 2750,2880 2790,2880 2860,2880 2890,2880 3000,2880 3040,2880 3080,2880 3120,2880 3160,2880 3200,2880 3240,2880 3280,2880 3410,2880 5720,2880 5800,2900 1030,2910 4200,2910 4240,2910 4280,2910 4320,2910 4360,2910 4400,2910 4440,2910 4480,2910 4520,2910 4560,2910 4600,2910 4640,2910 4680,2910 4720,2910 4760,2910 4800,2910 4840,2910 4880,2910 4920,2910 4960,2910 5000,2910 5040,2910 5080,2910 5120,2910 5160,2910 5200,2910 5240,2910 5280,2910 5320,2910 5360,2910 5400,2910 5440,2910 5480,2910 5520,2910 5560,2910 5600,2910 5640,2910 5680,2910 630,2920 690,2920 4140,2920 1070,2930 1120,2940 1160,2940 1200,2940 1340,2940 1380,2940 1420,2940 1460,2940 1500,2940 1540,2940 1580,2940 1620,2940 1660,2940 1890,2940 1940,2940 2050,2940 2100,2940 2140,2940 2180,2940 2220,2940 2750,2940 2790,2940 2840,2940 2890,2940 2940,2940 3000,2940 3040,2940 3080,2940 3120,2940 3160,2940 3200,2940 3240,2940 3280,2940 3320,2940 3360,2940 3400,2940 4100,2940 5760,2940 2540,2950 2580,2950 2620,2950 630,2960 690,2960 1690,2960 4070,2960 2650,2970 2690,2970 2720,2970 4200,2970 4240,2970 4280,2970 4320,2970 4360,2970 4400,2970 4440,2970 4480,2970 4520,2970 4560,2970 4600,2970 4640,2970 4680,2970 4720,2970 4760,2970 4800,2970 4840,2970 4880,2970 4920,2970 4960,2970 5000,2970 5040,2970 5080,2970 5120,2970 5160,2970 5200,2970 5240,2970 5280,2970 5320,2970 5360,2970 5400,2970 5440,2970 5480,2970 5520,2970 5560,2970 5600,2970 5640,2970 5680,2970 5720,2970 1230,2980 1270,2980 1310,2980 5760,2980 4040,2990 4140,2990 630,3000 690,3000 4020,3020 4100,3020 630,3040 690,3040 1720,3040 1870,3040 4020,3060 4080,3060 630,3080 690,3080 4020,3100 4080,3100 690,3120 630,3130 4020,3140 4080,3140 700,3160 1790,3170 640,3180 4020,3180 4080,3180 740,3200 660,3220 4020,3220 4080,3220 780,3240 700,3260 3980,3260 4080,3260 820,3280 740,3300 2800,3300 2840,3300 2880,3300 2920,3300 2960,3300 3000,3300 3040,3300 3080,3300 3120,3300 3160,3300 3200,3300 3240,3300 3280,3300 3320,3300 3360,3300 3400,3300 3440,3300 3480,3300 3520,3300 3560,3300 3600,3300 3640,3300 3680,3300 3720,3300 3760,3300 3800,3300 3840,3300 3880,3300 3920,3300 3960,3300 4040,3300 4080,3300 860,3320 780,3340 2760,3340 4000,3340 900,3360 3960,3360 4060,3360 820,3380 2720,3380 2800,3380 2840,3380 2880,3380 2920,3380 2960,3380 3000,3380 3040,3380 3080,3380 3120,3380 3160,3380 3200,3380 3240,3380 3280,3380 3320,3380 3360,3380 3400,3380 3440,3380 3480,3380 3520,3380 3560,3380 3600,3380 3640,3380 3680,3380 3720,3380 3760,3380 3800,3380 3840,3380 3880,3380 3920,3380 940,3400 860,3420 2680,3420 2760,3420 980,3440 900,3460 1020,3460 1060,3460 1100,3460 1140,3460 1180,3460 1220,3460 1260,3460 1300,3460 1340,3460 1380,3460 1420,3460 1460,3460 1500,3460 1540,3460 1580,3460 1620,3460 1660,3460 1700,3460 1740,3460 1780,3460 1820,3460 1860,3460 1900,3460 1940,3460 1980,3460 2020,3460 2060,3460 2100,3460 2140,3460 2180,3460 2220,3460 2260,3460 2300,3460 2340,3460 2380,3460 2420,3460 2460,3460 2500,3460 2540,3460 2580,3460 2640,3460 2720,3460 940,3500 2680,3500 980,3520 1020,3520 1060,3520 1100,3520 1140,3520 1180,3520 1220,3520 1260,3520 1300,3520 1340,3520 1380,3520 1420,3520 1460,3520 1500,3520 1540,3520 1580,3520 1620,3520 1660,3520 1700,3520 1740,3520 1780,3520 1820,3520 1860,3520 1900,3520 1940,3520 1980,3520 2020,3520 2060,3520 2100,3520 2140,3520 2180,3520 2220,3520 2260,3520 2300,3520 2340,3520 2380,3520 2420,3520 2460,3520 2500,3520 2540,3520 2580,3520 2640,3520 7440,3550 7490,3550 7440,3600 7490,3600 7540,3600 7600,3600 7650,3600 7700,3600 7750,3600 7800,3600 7440,3640 7490,3640 7540,3640 7600,3640 7650,3640 7700,3640 7750,3640 7800,3640 7440,3710 7490,3710 7630,3710 7440,3780 7490,3780 7540,3780 7600,3780 7650,3780 7700,3780 7750,3780 7800,3780 7440,3820 7490,3820 7540,3820 7600,3820 7650,3820 7700,3820 7750,3820 7800,3820 7440,3860 7490,3860 7540,3860 7600,3860 7650,3860 7700,3860 7750,3860 7800,3860
  other v2: 4600.94,1050.63 4640.31,1050.63 4679.69,1050.63 4719.06,1050.63 4600.94,1090 4640.31,1090 4679.69,1090 4719.06,1090 4600.94,1129.37 4640.31,1129.37 4679.69,1129.37 4719.06,1129.37 3354.57,1300 3425.43,1300 3390,1334 3390,2626.63 3390,2660.63
  other v3: 7023.23,2544.41 7074.41,2544.41 7125.59,2544.41 7176.77,2544.41 7023.23,2595.59 7074.41,2595.59 7125.59,2595.59 7176.77,2595.59 7984.41,2823.23 8035.59,2823.23 7984.41,2874.41 8035.59,2874.41 7984.41,2925.59 8035.59,2925.59 9230,2940.31 9210.31,2960 9249.69,2960 8035.59,2976.77 9230,2979.68 7000.71,3568.23 7051.89,3568.23 7000.71,3619.41 7051.89,3619.41 7000.71,3670.59 7051.89,3670.59 7000.71,3721.77 7051.89,3721.77
  other v4: 446.46,18.94 753.54,18.94 5316.46,18.94 5623.54,18.94 446.46,48.47 753.54,48.47 5316.46,48.47 5623.54,48.47 446.46,78 753.54,78 5316.46,78 5623.54,78 446.46,107.53 753.54,107.53 5316.46,107.53 5623.54,107.53 446.46,137.06 753.54,137.06 5316.46,137.06 5623.54,137.06
  other v5: 2349.94,2865 2379.94,2865 2409.94,2865 2349.94,2890 2409.94,2890 2349.94,2915 2409.94,2915
  other v6: 6141.81,3086.14 6181.18,3086.14 6220.55,3086.14 6141.81,3125.51 6181.18,3125.51 6220.55,3125.51 6141.81,3164.88 6181.18,3164.88 6220.55,3164.88
GND_IN: C23.1 C25.1 C26.1 D4.2 D5.2 FL1.1 J5.2 J5.3
  other v1: 9750,3550 9800,3550 9000,3600 9050,3600 9100,3600 9750,3600 9800,3600 9000,3650 9050,3650 9100,3650 9150,3650 9600,3650 9650,3650 9700,3650 9750,3650 9800,3650 8800,3700 8850,3700 8900,3700 8950,3700 9000,3700 9050,3700 9100,3700 9150,3700 9600,3700 9650,3700 9700,3700 9750,3700 9800,3700 8800,3750 8850,3750 8900,3750 8950,3750 9000,3750 9050,3750 9100,3750 9150,3750 9750,3750 9800,3750 9250,3800 9300,3800 9350,3800 9450,3800 9500,3800 9550,3800 9750,3800 9800,3800 9250,3850 9300,3850 9350,3850 9450,3850 9500,3850 9550,3850 9750,3850 9800,3850
GND_INT: C27.1 C28.1 C29.1 C30.1 C31.1 C32.1 FB5.1 FL1.4
  other v1: 8300,3700 8350,3700 8400,3700 8450,3700 8500,3700 8550,3700 8300,3750 8350,3750 8400,3750 8450,3750 8500,3750 8550,3750 7950,3800 8000,3800 8050,3800 8100,3800 8150,3800 8200,3800 8300,3800 8350,3800 8400,3800 8450,3800 8500,3800 8550,3800 7950,3850 8000,3850 8050,3850 8100,3850 8150,3850 8200,3850
I2C2__SCL: J3.6 R129.2 U4.34 | length 3826
  Top Layer w10: U4.34@8821.5,1472.05 8864.73,1472.05 8906.78,1430 9075,1430 v1(9085,1440) R129.2@9120,1440
  Bottom Layer w8: J3.6@6549.8,2000 6423,1873.2 6423,1373 6491,1305 8261,1305 8415,1459 8666,1459 8763,1362 9007,1362 v1(9085,1440)
I2C2_SDA: J3.8 R33.2 U4.35 | length 3597.5
  Top Layer w10: U4.35@8821.5,1491.73 8855.25,1491.73 8856.3,1490.68 8873.7,1490.68 8874.01,1490.99 8875,1490 v1(9085,1490) R33.2@9120,1490
  Bottom Layer w8: J3.8@6549.8,1900 6475,1825.2 6475,1410 6536,1349 7800.72,1349 7801.72,1350 7941,1350 7967,1324 8211,1324 8280,1393 8280,1395.28 8336.5,1451.78 8343.28,1451.78 8363.5,1472 8700,1472 8773,1399 8994,1399 v1(9085,1490)
L1_1_PE42462: R64.2 R78.1 R120.1 U4.23 | length 6357.6
  Top Layer w10: R64.2@3400,2405 v1(3400,2445) R78.1@3400,2475.2 ; U4.23@8570.47,1378.5 8570.47,1164.53 v1(8600,1135) R120.1@8600,1100
  Bottom Layer w8: v1(3400,2445) 3400,2398 3350,2348 3350,2138.28 3360,2128.28 3360,2128 3708,1780 3844,1780 4044,1580 4188.28,1580 4233.28,1535 4487,1535 4562,1460 4628.28,1460 4668.28,1420 4708.28,1420 4709.28,1419 5095,1419 5317,1197 6168.72,1197 6172.9,1201.19 6336.86,1201.19 6341.05,1197 8538,1197 v1(8600,1135)
L2_1_PE42462: R65.2 R76.1 R119.1 U4.22 | length 6996.8
  Top Layer w10: R65.2@3440,2405 v1(3440,2445) R76.1@3440,2475.2 ; R119.1@8550,1100 v1(8550,1135) 8550.79,1135.79 U4.22@8550.79,1378.5
  Bottom Layer w8: v1(3440,2445) 3410,2475 3162,2475 3098,2411 3098,2100.28 3100,2098.28 3100,2001.72 3111.72,1990 3128.28,1990 3210,1908.28 3210,1892 3262,1840 3556,1840 3696,1700 3828.28,1700 3840,1688.28 3840,1684 4024,1500 4188.28,1500 4218.28,1470 4428.28,1470 4440,1458.28 4440,1444 4504,1380 4708.28,1380 4709.28,1381 4991,1381 5102,1270 5134,1270 5228,1176 6146.3,1176 6148.69,1178.38 6155.31,1178.38 6160,1173.7 6160,1171.72 6171.72,1160 6237.5,1160 6265.69,1188.19 6331.47,1188.19 6361.66,1158 8527,1158 v1(8550,1135)
L3_1_PE42462: R66.2 R74.1 R116.1 U4.21 | length 7340.8
  Top Layer w10: R66.2@3480,2405 v1(3480,2445) R74.1@3480,2475.2 ; R116.1@8500,1100 v1(8500,1135) 8531.1,1166.1 8531.1,1335.27 ; U4.21@8531.1,1378.5 8531.1,1335.27 ; 8531.37,1335 8531.1,1335.27
  Bottom Layer w8: v1(3480,2445) 3480,2487 3449,2518 3150,2518 3020,2388 3020,1784.69 3144.69,1660 3608.28,1660 3640,1628.28 3640,1611.72 3671.72,1580 3768.28,1580 3808.28,1540 3828.28,1540 3948.28,1420 4188.28,1420 4193.28,1425 4327,1425 4403,1349 4986,1349 5234,1101 6232.72,1101 6251.72,1120 6268.28,1120 6287.28,1101 8466,1101 v1(8500,1135)
LCD_BL: Q1.5 R18.2 U4.11 | length 13066.6
  Top Layer w10: v1(3639,3705) 3640,3704 R18.2@3640,3670 3715,3670 3724.41,3660.59 Q1.5@3724.41,3640 ; v1(8355,673) 8354,674 8354,1301 8379,1326 8379,1377 8470,1468 8470,1530 8449.21,1550.79 U4.11@8378.5,1550.79
  Bottom Layer w10: v1(3639,3705) 2994.7,3705 2688.7,3399 2068,3399 1985,3316 1957,3316 1911,3270 1911,2871.3 1879,2839.3 1879,610.7 1881,608.7 1881,571.3 1879,569.3 1879,510.7 1881,508.7 1881,491.3 1879,489.3 1879,254 2049,84 2833.7,84 2910.7,161 2950.7,161 2970.7,181 3008.7,181 3059.7,130 4760.3,130 4951.3,321 4989.3,321 4991.3,319 5049.3,319 5151.3,421 5428.7,421 5456.7,393 5677,393 5820,250 7511,250 7934,673 v1(8355,673)
LCD_RST: J2.1 U4.58 | length 7766.8
  Top Layer w6: U4.58@8570.47,1821.5 8570.47,1875.53 8561,1885 8561,2156 8595,2190 8813,2190 9085,1918 9558,1918 9680,2040 v1(9680,2180)
  Bottom Layer w6: J2.1@4590,3610 4661,3681 6002.13,3681 6012.13,3671 6426,3671 6444,3689 6661,3689 6825,3525 7222,3525 7522,3225 7522,2822 7580,2764 7842.87,2764 7845.87,2761 8680,2761 9261,2180 v1(9680,2180)
LCD_SPI_CSn: J2.2 R16.1 U4.50 | length 8321.8
  Top Layer w8: U4.50@8727.95,1821.5 8727.95,1845 8730,1847.05 R16.1@8730,2024.72 8775.28,2024.72 8958,1842 9682,1842 9900,2060 v1(9900,2180)
  Bottom Layer w8: J2.2@4490,3610 4541,3661 4618,3661 4662,3705 5961,3705 5974,3718 6684,3718 6812,3590 7221.77,3590 7248.46,3563.31 7248.46,3559.83 7250,3558.28 7250,3551.72 7558,3243.72 7558,2832 7604,2786 8180.72,2786 8181.72,2785 8710,2785 9260,2235 9677,2235 9715,2197 9715,2182 9682,2149 9682,2035 9700,2017 9816,2017 9900,2101 v1(9900,2180)
LCD_SPI_MISO: J2.5 R40.1 U4.56 | length 8714.3
  Top Layer w7: U4.56@8609.84,1821.5 8610,1821.66 8610,1856.68 8609.76,1856.92 8609.76,1873.08 8610,1873.32 R40.1@8610,2020 8656,2020 8666,2030 8666,2131 8692,2157 8771,2157 9046,1882 9602,1882 9780,2060 v1(9780,2180)
  Bottom Layer w7: J2.5@4190,3610 4201.76,3621.76 4201.76,3654.76 4209.13,3662.13 4209.83,3662.13 4242.13,3694.43 4242.13,3761.13 4300,3819 6806,3819 7001,3819 7089.5,3730.5 7164.5,3730.5 7175.5,3719.5 7347.5,3719.5 7386,3681 7386,3626.42 7437.42,3575 7442.58,3575 7470.5,3547.08 7470.5,3541.92 7481.92,3530.5 7487.08,3530.5 7679,3338.58 7679,2988 7711.5,2955.5 8040.26,2955.5 8044.76,2960 9034,2960 9094,2900 9094,2648 9371,2371 9751,2371 9806,2316 9806,2206 v1(9780,2180)
LCD_SPI_MOSI: J2.4 U4.57 | length 8362.1
  Top Layer w8: U4.57@8590.16,1821.5 8590.16,1890.6 8583,1897.75 8583,2127 8627,2171 8796,2171 9067,1900 9580,1900 9724,2044 v1(9724,2124)
  Bottom Layer w8: J2.4@4290,3610 4341.63,3661.63 4341.63,3730.04 4410.59,3799 6736,3799 6837,3698 7210.36,3698 7250,3658.36 7250,3651.72 7301.72,3600 7337,3600 7629,3308 7629,2932 7662,2899 8824,2899 9000,2723 9000,2665 9340,2325 9708,2325 9760,2273 9760,2160 v1(9724,2124)
LCD_SPI_SCK: J2.3 U4.55 | length 8425.8
  Top Layer w8: U4.55@8629.53,1821.5 8629.53,1932.53 8697,2000 8697,2116 8719,2138 8749,2138 9025,1862 9642,1862 9838.74,2058.74 9838.74,2118.74 v1(9840,2120)
  Bottom Layer w8: J2.3@4390,3610 4401.32,3621.32 4401.32,3655.32 4407.63,3661.63 4410.04,3661.63 4438.37,3689.96 4438.37,3733.37 4476,3771 4979,3771 4981,3773 6683,3773 6811,3645 7199,3645 7274,3570 7288.28,3570 7590,3268.28 7590,2879 7626.93,2842.07 8043.4,2842.07 8055.47,2830 8827,2830 8909,2748 8909,2679.28 9313.28,2275 9707,2275 9740,2242 9740,2180 9704,2144 9704,2082.69 9708.69,2078 9798,2078 v1(9840,2120)
LEFT_BUT: J2.14 R20.1 | length 232.2
  Top Layer w10: J2.14@4590,3710 4650,3650 R20.1@4650,3502.64
LEFT_BUT_uC: C21.2 R20.2 R23.1 U4.24 | length 8114.2
  Top Layer w8: U4.24@8590.16,1378.5 8590.16,1231.84 8676,1146 9246,1146 v1(9247,1147)
  Top Layer w10: R20.2@4650,3457.36 R23.1@4650,3390 C21.2@4700,3390 v1(4700,3612)
  Bottom Layer w8: v1(4700,3612) 4734,3646 6631,3646 6788,3489 7207,3489 7472,3224 7472,3004 7472,2812 7561,2723 7806,2723 7820.5,2708.5 8678.5,2708.5 9653,1734 9653,1246 9554,1147 v1(9247,1147)
MAIN_VDC: C3.2 C4.2 C5.2 C6.2 C33.2 C34.2 C35.2 C45.2 C46.2 C47.2 C48.2 C76.2 C77.2 C78.2 C79.2 FB4.2 T4.1 U1.2 U3.2 U3.3 U8.2 | length 657.7
  Top Layer w12: U8.2@7132.6,3620 v1(7190,3620) C79.2@7230,3620 ; C77.2@7375,3702.91 7332.91,3702.91 v1(7330,3700) 7327.09,3702.91 C76.2@7280,3702.91 v1(7280,3650) ; C47.2@7750,2930 C48.2@7800,2930 ; C79.2@7230,3620 C78.2@7280,3620 ; C79.2@7230,3620 v1(7230,3650) v1(7280,3650) ; C78.2@7280,3620 v1(7320,3620) ; C78.2@7280,3620 v1(7280,3650) ; v1(7280,3650) v1(7320,3650) ; v1(7320,3620) v1(7320,3650) ; v1(7320,3620) v1(7350,3620) v1(7350,3650) v1(7320,3650)
MAIN_VDC_IN: F1.1 J5.1 | length 671.5
  Top Layer w70: F1.1@9866.5,3300 9866.5,3476.5 9938.43,3548.43 J5.1@10091.54,3548.43 J5.1@10091.54,3788.58
NetBT1_2: BT1.2 D9.1 | length 2880.7
  Top Layer w20: D9.1@8110,2040 8075,2040 8067,2040 7991,1964 7991,1694 8067.52,1617.48 8067.52,562.48 BT1.2@8067.52,426.38 8067.52,297.48 8110,255 8895,255 8932.48,292.48 BT1.2@8932.48,426.38
NetC1_1: C1.1 U1.6 | length 75.8
  Top Layer w12: C1.1@7070,2390 7075,2395 U1.6@7075,2463.7
NetC2_1: C2.1 L1.1 U1.8
NetC2_2: C2.2 U1.7 | length 75.8
  Top Layer w10: U1.7@7125,2463.7 7125,2395 C2.2@7130,2390
NetC7_1: C7.1 R2.1 R4.2 U1.5 | length 185
  Top Layer w10: C7.1@6900,2470 R2.1@6950,2470 ; R4.2@6950,2527.36 R2.1@6950,2470 ; U1.5@7025,2463.7 7018.7,2470 R2.1@6950,2470
NetC12_2: C12.2 MTG1.0 | length 202.7
  Top Layer w10: C12.2@200,407.32 MTG1.0@200,610
NetC13_2: C13.2 MTG2.0 | length 202.7
  Top Layer w10: C13.2@200,2917.32 MTG2.0@200,3120
NetC15_2: C15.2 R15.1 R19.2 U4.14 | length 680.1
  Top Layer w10: R19.2@7892.64,1440 R15.1@7892.64,1490 C15.2@7950,1490 v1(7985,1490) ; U4.14@8378.5,1491.73 8421.73,1491.73 v1(8422,1492)
  Bottom Layer w10: v1(7985,1490) 8245,1490 8315,1560 8354,1560 v1(8422,1492)
NetC16_2: C16.2 R41.1 R42.2 U4.15 | length 574
  Top Layer w10: R42.2@7892.64,1330 R41.1@7892.64,1380 C16.2@7950,1380 v1(7985,1380) ; v1(8335,1471.78) 8335.27,1472.05 U4.15@8378.5,1472.05
  Bottom Layer w10: v1(7985,1380) 8198,1380 8289.78,1471.78 v1(8335,1471.78)
NetC23_2: C23.2 C25.2 C26.2 D3.1 D4.1 D5.1 FL1.2
NetC27_2: C27.2 C28.2 C29.2 C30.2 C31.2 C32.2 FB4.1 FL1.3
  other v1: 7950,3250 8000,3250 8050,3250 8100,3250 8150,3250 8200,3250 8250,3250 8300,3250 8350,3250 8400,3250 8450,3250 8500,3250 7950,3300 8000,3300 8050,3300 8100,3300 8150,3300 8200,3300 8250,3300 8300,3300 8350,3300 8400,3300 8450,3300 8500,3300
NetC36_2: C36.2 MTG3.0 | length 195
  Top Layer w15: C36.2@1490,900 MTG3.0@1490,1095
NetC37_2: C37.2 MTG4.0 | length 200
  Top Layer w8: C37.2@3060,410 MTG4.0@3060,610
NetC38_2: C38.2 MTG5.0 | length 200
  Top Layer w15: C38.2@2860,3120 MTG5.0@3060,3120
NetC39_2: C39.2 MTG6.0 | length 200
  Top Layer w8: MTG6.0@3700,610 C39.2@3900,610
NetC40_2: C40.2 MTG7.0 | length 200
  Top Layer w10: C40.2@3500,3120 MTG7.0@3700,3120
NetC41_2: C41.2 MTG8.0 | length 200
  Top Layer w10: C41.2@6560,410 MTG8.0@6560,610
NetC42_2: C42.2 MTG9.0 | length 200
  Top Layer w15: C42.2@6560,2920 MTG9.0@6560,3120
NetC43_1: C43.1 U3.6 | length 75.8
  Top Layer w15: U3.6@8116.3,2875 8185,2875 C43.1@8190,2870
NetC44_1: C44.1 L2.1 U3.8
NetC44_2: C44.2 U3.7 | length 79.9
  Top Layer w15: U3.7@8116.3,2925 8175,2925 C44.2@8190,2940
NetC49_1: C49.1 R8.1 R17.2 U3.5 | length 225
  Top Layer w15: U3.5@8116.3,2825 8116.3,2733.7 R17.2@8120,2730 R8.1@8197.36,2730 8197.36,2682.64 C49.1@8200,2680
NetC54_2: C54.2 C55.2 FB1.1 U4.13 | length 194.8
  Top Layer w10: FB1.1@8240,1450 C54.2@8300,1450 C55.2@8300,1502.68 8332.68,1502.68 v1(8335,1505) 8341.42,1511.42 U4.13@8378.5,1511.42
NetC68_1: C68.1 R34.1 R36.2 U2.3 | length 175
  Top Layer w10: U2.3@9230,2880.87 9230,2845 9240,2835 C68.1@9240,2810 R34.1@9290,2810 R36.2@9340,2810
NetC73_2: C73.2 U2.13 | length 55.4
  Top Layer w6: U2.13@9230,3038.74 9230,3048.13 9234,3052.13 9234,3054 9240,3060 C73.2@9240,3090
NetC74_1: C74.1 U8.6 | length 84
  Top Layer w12: C74.1@6850,3702.68 6850.79,3702.68 6856.6,3696.87 6856.6,3696.08 6879.45,3673.23 6916.77,3673.23 U8.6@6920,3670
NetC75_1: C75.1 L3.1 U8.8 | length 76.4
  Top Layer w15: C75.1@6850,3585.35 6865.35,3570 U8.8@6920,3570
NetC75_2: C75.2 U8.7 | length 70
  Top Layer w15: C75.2@6850,3620 U8.7@6920,3620
NetC80_1: C80.1 R28.2 R38.1 U8.5 | length 200
  Top Layer w15: U8.5@6920,3720 R38.1@6920,3810 ; C80.1@6920,3860 R38.1@6920,3810 ; R28.2@6980,3810 R38.1@6920,3810
NetC92_2: C92.2 C93.2 C115.2 U9.14 | length 213.9
  Top Layer w8: U9.14@6155.59,3220 6155.59,3278.27 C92.2@6180,3302.68 C93.2@6230,3302.68 6297.32,3302.68 C115.2@6300,3300
NetC100_2: C100.2 R43.1 R44.2 U4.16 | length 722.1
  Top Layer w10: R44.2@7892.64,1220 R43.1@7892.64,1270 C100.2@7950,1270 v1(7985,1270) ; v1(8277,1225) 8277,1313 8379,1415 U4.16@8379,1451.86
  Bottom Layer w10: v1(7985,1270) 7986.2,1270 8031.2,1225 v1(8277,1225)
NetC106_1: C106.1 DPX1.9 | length 162
  Top Layer w6.81: DPX1.9@660,2479.92 C106.1@660,2641.89
NetC107_1: C107.1 J6.1 | length 242
  Top Layer w6.81: J6.1@600,78 C107.1@600,320
NetC107_2: C107.2 U5.3 | length 113.8
  Top Layer w6.81: C107.2@600,356.22 U5.3@600,470
NetC108_1: C108.1 U5.4 | length 110.2
  Top Layer w6.81: U5.4@600,579.84 C108.1@600,690
NetC108_2: C108.2 DPX1.18 | length 721.6
  Top Layer w6.81: C108.2@600,726.22 600,878.58 cw(c700,878.58) 629.29,949.29 827.56,1147.56 ccw(c756.85,1218.27) 856.85,1218.27 DPX1.18@856.85,1350
NetC109_1: C109.1 DPX1.7 | length 90.1
  Top Layer w6.81: DPX1.7@1053.7,2479.92 C109.1@1053.7,2570
NetC109_2: C109.2 U12.1 | length 75.9
  Top Layer w6.81: U12.1@1050,2680 1050,2609.92 ccw(c1053.7,2609.92) C109.2@1053.7,2606.22
NetC110_1: C110.1 U12.6 | length 183.5
  Top Layer w15: U12.6@1050,2789.84 1050,2866.81 cw(c1093.19,2866.81) 1093.19,2910 C110.1@1131.89,2910